# Altium PCB AS01-ML01D-V5.0.pcbdoc
Units mm, origin at the board's own origin, x right, y up, seen from the top; angles counter-clockwise.
Board outline 47.65 x 41.65 mm, 2 copper layers (Top Layer, Bottom Layer); 1 components, 9 nets, 8 pads, 0 vias.
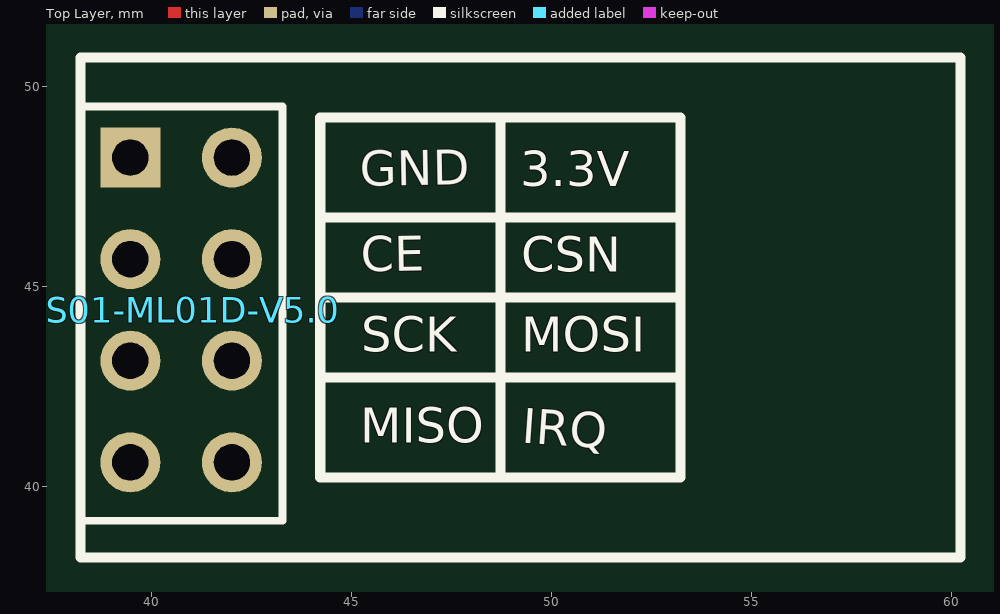
[diagram p0: Top Layer view]
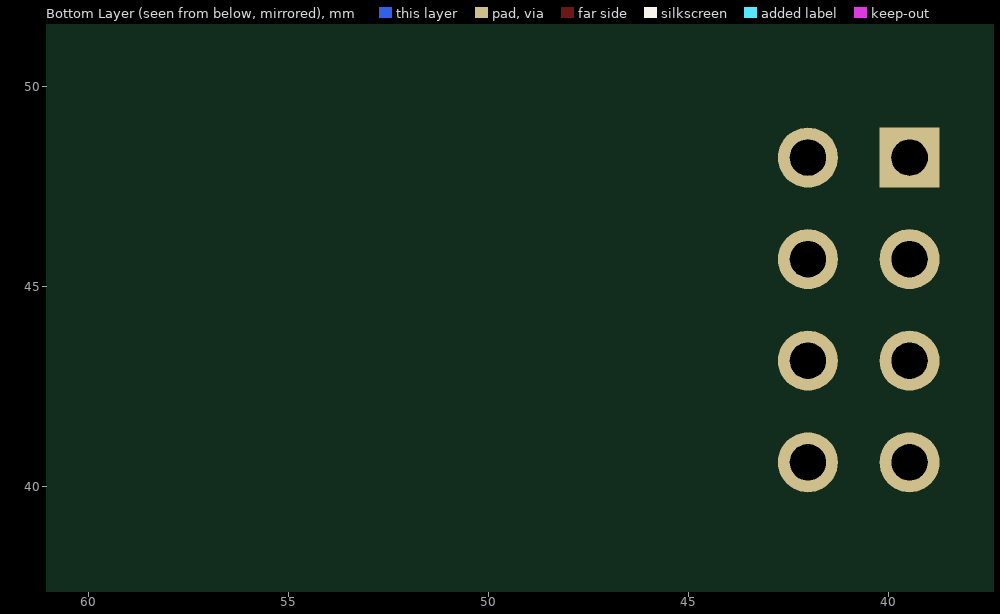
[diagram p1: Bottom Layer view, seen from below]

## Layer stack, top to bottom
Top Layer: signal copper (thickness not stored)
Dielectric: dielectric 0.32, FR-4, Dk 4.8
Bottom Layer: signal copper (thickness not stored)

## Board outline
73.054,25.4 25.4,25.4 25.4,67.048 73.054,67.048

## Components (designator, comment, footprint, x,y, rotation, side; value= is the part's Value field where it differs from the comment)
AS01-ML01D-V5.0 "HEADER2X4" HEADER2X4 39.477,48.227 r180 top

## Footprints (in the part's own frame and the unit in brackets; to place one, negate y for a bottom-side part, rotate by r counter-clockwise, add the part's x,y. Pads: shape width x height; smd on the part's side, far side on the other; paste and mask are expansions set on the pad)
HEADER2X4 [mil]
  rect 59.06x59.06 hole 35.44 slot 35.64 at 0 deg: 1(0.03,0.05)
  round 59.06 hole 35.44 slot 35.64 at 90 deg: 2(-100.01,0) 3(-0.01,100) 4(-100.01,100) 5(-0.01,200) 6(-100.01,200) 7(-0.01,300) 8(-100.01,300)
  silkscreen extent -150,-50 50,358

## Nets (pads, with @x,y where several pads share a name; then routed paths per layer and width w, separated by ;. In a path a pad name is that pad's centre, name@x,y a point inside that pad or via, vN(x,y) a via of type N, cw(c..) or ccw(c..) an arc to the next point about the centre after c; other vN are vias at no path point)
S$50: 
S$52: 
S$56: 
S$58: 
S$1757: 
S$1764: 
S$1856: 
S$1860: 
S$1862: 
pads on no net: AS01-ML01D-V5.0.1 AS01-ML01D-V5.0.2 AS01-ML01D-V5.0.3 AS01-ML01D-V5.0.4 AS01-ML01D-V5.0.5 AS01-ML01D-V5.0.6 AS01-ML01D-V5.0.7 AS01-ML01D-V5.0.8

## Silkscreen, mask and mechanical layers (free items; w line width, h text height)
Top Overlay:
  lines w0.254 net S$1757: 44.227,40.226 53.228,40.226 53.228,49.228 45.227,49.228 44.227,49.228 44.227,40.226
  lines w0.254 net S$1764: 48.727,40.225 48.727,49.227
  lines w0.254 net S$1856: 44.227,46.727 53.227,46.727
  lines w0.254 net S$1860: 44.227,44.727 53.227,44.727
  lines w0.254 net S$1862: 44.227,42.727 53.227,42.727
  lines w0.254 net S$50: 38.227,38.227 38.227,50.727
  lines w0.254 net S$52: 38.227,50.727 60.227,50.727
  lines w0.254 net S$56: 38.227,38.227 60.227,38.227
  lines w0.254 net S$58: 60.227,38.227 60.227,50.727
  text "GND" at 45.227,47.227 h1.5 r1
  text "3.3V" at 49.227,47.227 h1.5
  text "CE" at 45.244,45.083 h1.5 r1
  text "CSN" at 49.244,45.083 h1.5
  text "SCK" at 45.244,43.083 h1.5
  text "MOSI" at 49.244,43.083 h1.5
  text "MISO" at 45.227,40.807 h1.5
  text "IRQ" at 49.227,40.807 h1.5 r356
Document:
  lines w0.003: 49.202,46.198 49.252,46.249